# EAGLE board SMTCylonV13 (EAGLE 5.07)
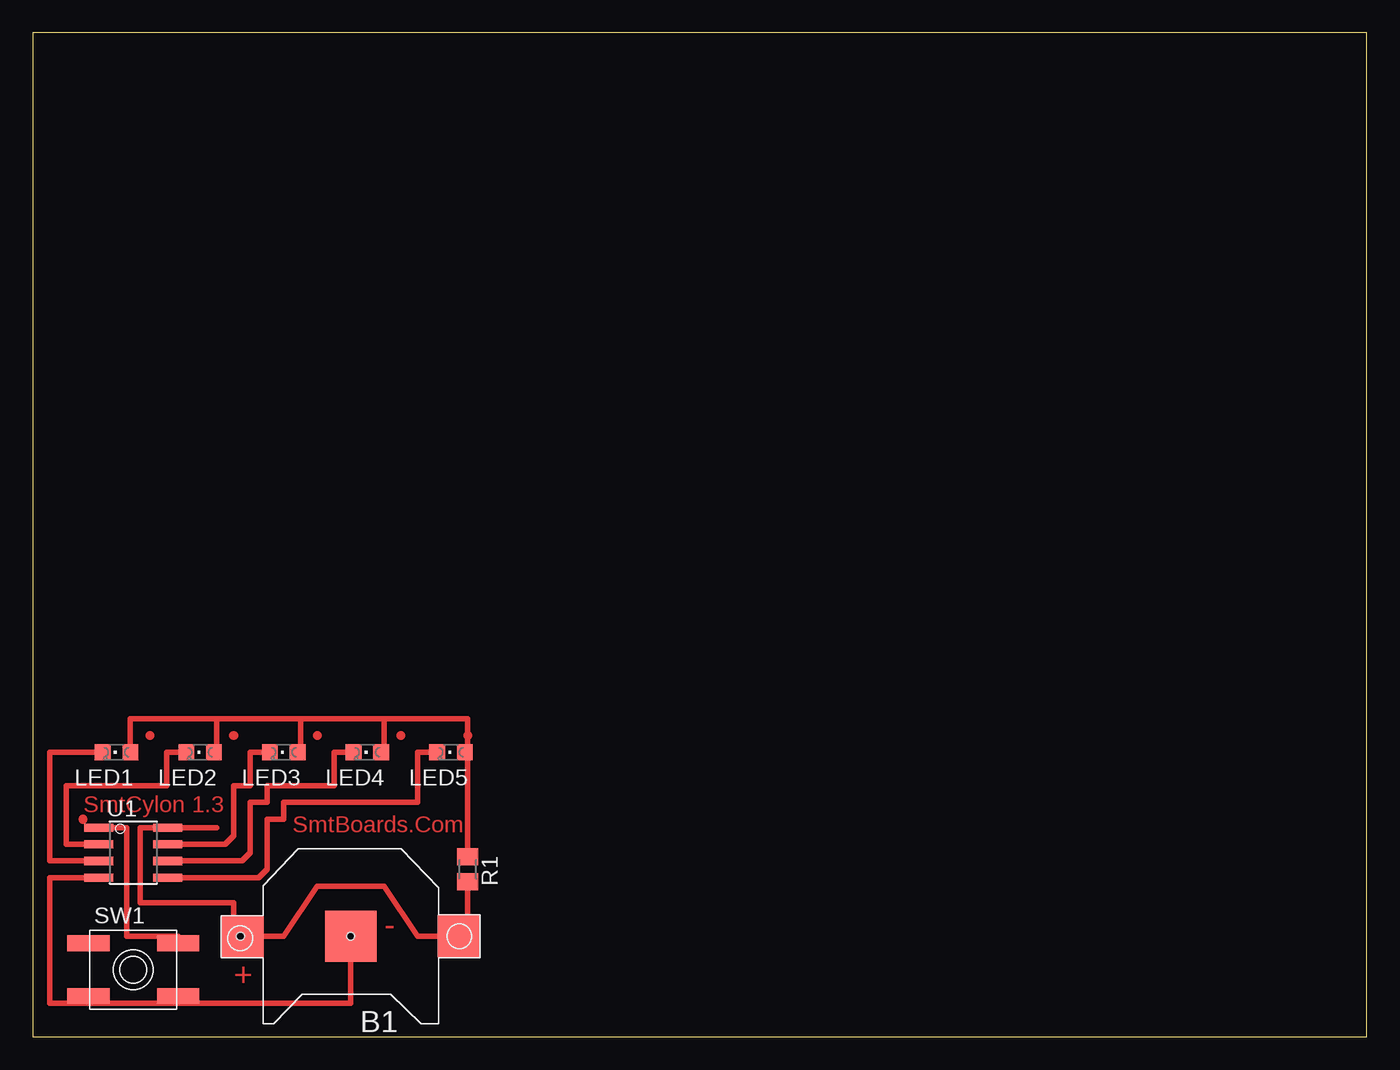
[diagram p0: board, top side]

Size 101.27 x 76.19 mm. Coordinates in mm from the lower left corner, seen from the top.
Outline: 0,0 101.27,0 101.27,76.19 0,76.19 0,0
Copper layers (1*16): Top 0.035mm / dielectric 1.5mm / Bottom 0.035mm
Design rules "default": minimum track width 10mil, minimum drill 24mil, track to track 8mil, track to pad 8mil, pad to pad 8mil, via to via 8mil, smd to smd 8mil, copper to edge 40mil, drill to drill 8mil, minimum pad ring 10mil, minimum via ring 8mil, stop-mask expansion 4mil, vias tented up to drill 0mil, thermal gap 10mil
Holes 0.6 mm at 15.75,7.62 24.13,7.62

## Footprints (pad centres in the part's own frame; a part is rotated, then mirrored left to right if it is on the bottom)
CR1220-SMD = smd 3.2 x 3.2: +$1 -8.2,0; +$2 8.2,0 | smd 3.9 x 3.9: - 0,0
CHIPLED_0805 = smd 1.2 x 1.2: A 0,-1.05; C 0,1.05
M0805 = smd 1.3 x 1.6: 1 -0.95,0; 2 0.95,0
EVQ-Q2 = smd 3.2 x 1.2: A -3.4,-2; A' 3.4,-2; B -3.4,2; B' 3.4,2
SO08 = smd 0.61 x 2.21: 1 -1.905,-2.616; 2 -0.635,-2.616; 3 0.635,-2.616; 4 1.905,-2.616; 5 1.905,2.616; 6 0.635,2.616; 7 -0.635,2.616; 8 -1.905,2.616

## Placement (x,y rotation side)
B1  [CR1220-SMD]  24.13,7.62 180 top
LED1  [CHIPLED_0805]  6.35,21.59 90 top
LED2  [CHIPLED_0805]  12.7,21.59 90 top
LED3  [CHIPLED_0805]  19.05,21.59 90 top
LED4  [CHIPLED_0805]  25.4,21.59 90 top
LED5  [CHIPLED_0805]  31.75,21.59 90 top
R1  180  [M0805]  33.02,12.7 270 top
SW1  EVQQ2  [EVQ-Q2]  7.62,5.08 0 top
U1  TINY13S2  [SO08]  7.62,13.97 270 top

## Library data of the parts
B1 R1 SW1 = adafruit
LED1-LED5 = led
U1 = avr-6

## Nets
GND4: B1.- SW1.A U1.4
N$33: LED1.C U1.3
N$34: LED2.C U1.2
N$35: LED3.C U1.7
N$36: LED4.C U1.6
N$37: LED5.C U1.5
N$38: LED1.A LED2.A LED3.A LED4.A LED5.A R1.1
N$39: SW1.B' U1.1
VCC4: B1.+$1 B1.+$2 R1.2 U1.8

## Tracks (layer width: path | path; a pad name or v marks a point on that pad's centre or on a via)
GND4
  Top 0.406: U1.4 1.27,12.06 1.27,2.54 4.22,2.54 | 4.22,2.54 24.13,2.54 B1.- | 4.22,2.54 SW1.A
N$33
  Top 0.406: U1.3 1.27,13.34 1.27,21.59 LED1.C
N$34
  Top 0.406: U1.2 2.54,14.61 2.54,19.05 10.16,19.05 10.16,21.59 LED2.C
N$35
  Top 0.406: LED3.C 16.51,21.59 16.51,19.05 15.24,19.05 15.24,15.24 14.61,14.61 U1.7
N$36
  Top 0.406: LED4.C 22.86,21.59 22.86,19.05 17.78,19.05 17.78,17.78 16.51,17.78 16.51,13.97 15.88,13.34 U1.6
N$37
  Top 0.406: U1.5 17.14,12.06 17.78,12.7 17.78,16.51 19.05,16.51 19.05,17.78 29.21,17.78 29.21,21.59 LED5.C
N$38
  Top 0.406: 32.8,13.65 R1.1 33.02,21.59 | 33.02,21.59 LED5.A | 33.02,21.59 33.02,24.13 26.67,24.13 | LED4.A 26.67,21.59 26.67,24.13 | 20.32,24.13 26.67,24.13 | LED3.A 20.32,21.59 20.32,24.13 | 13.97,24.13 20.32,24.13 | 13.97,24.13 13.97,21.59 LED2.A | 13.97,24.13 7.4,24.13 LED1.A
N$39
  Top 0.406: U1.1 7.11,15.88 7.11,7.62 11.02,7.62 SW1.B'
N$40
  Top 0.406: 10.16,15.88 13.97,15.88
VCC4
  Top 0.406: U1.8 8.13,15.88 8.13,10.16 15.24,10.16 15.24,7.62 B1.+$2 19.05,7.62 21.59,11.43 26.67,11.43 29.21,7.62 30.48,7.62 31.75,7.62 B1.+$1 33.02,8.31 R1.2
(copper drawn outside any net)
  shapes: Top circle x6

## Text on the board
Top: SmtCylon 1.3 | SmtBoards.Com | - | +